# Altium PCB 175-00018_rev1, 3-Chan IR Thermocouple Apps board.PcbDoc
Units mil, origin at the board's own origin, x right, y up, seen from the top; angles counter-clockwise.
Board outline 1377.95 x 3149.61 mil, 4 copper layers (Top Layer (*.GTL), GND (*.GP1), +/- 12V (*.GP2), Bottom Layer (*.GBL)); 36 components, 28 nets, 243 pads, 43 vias.
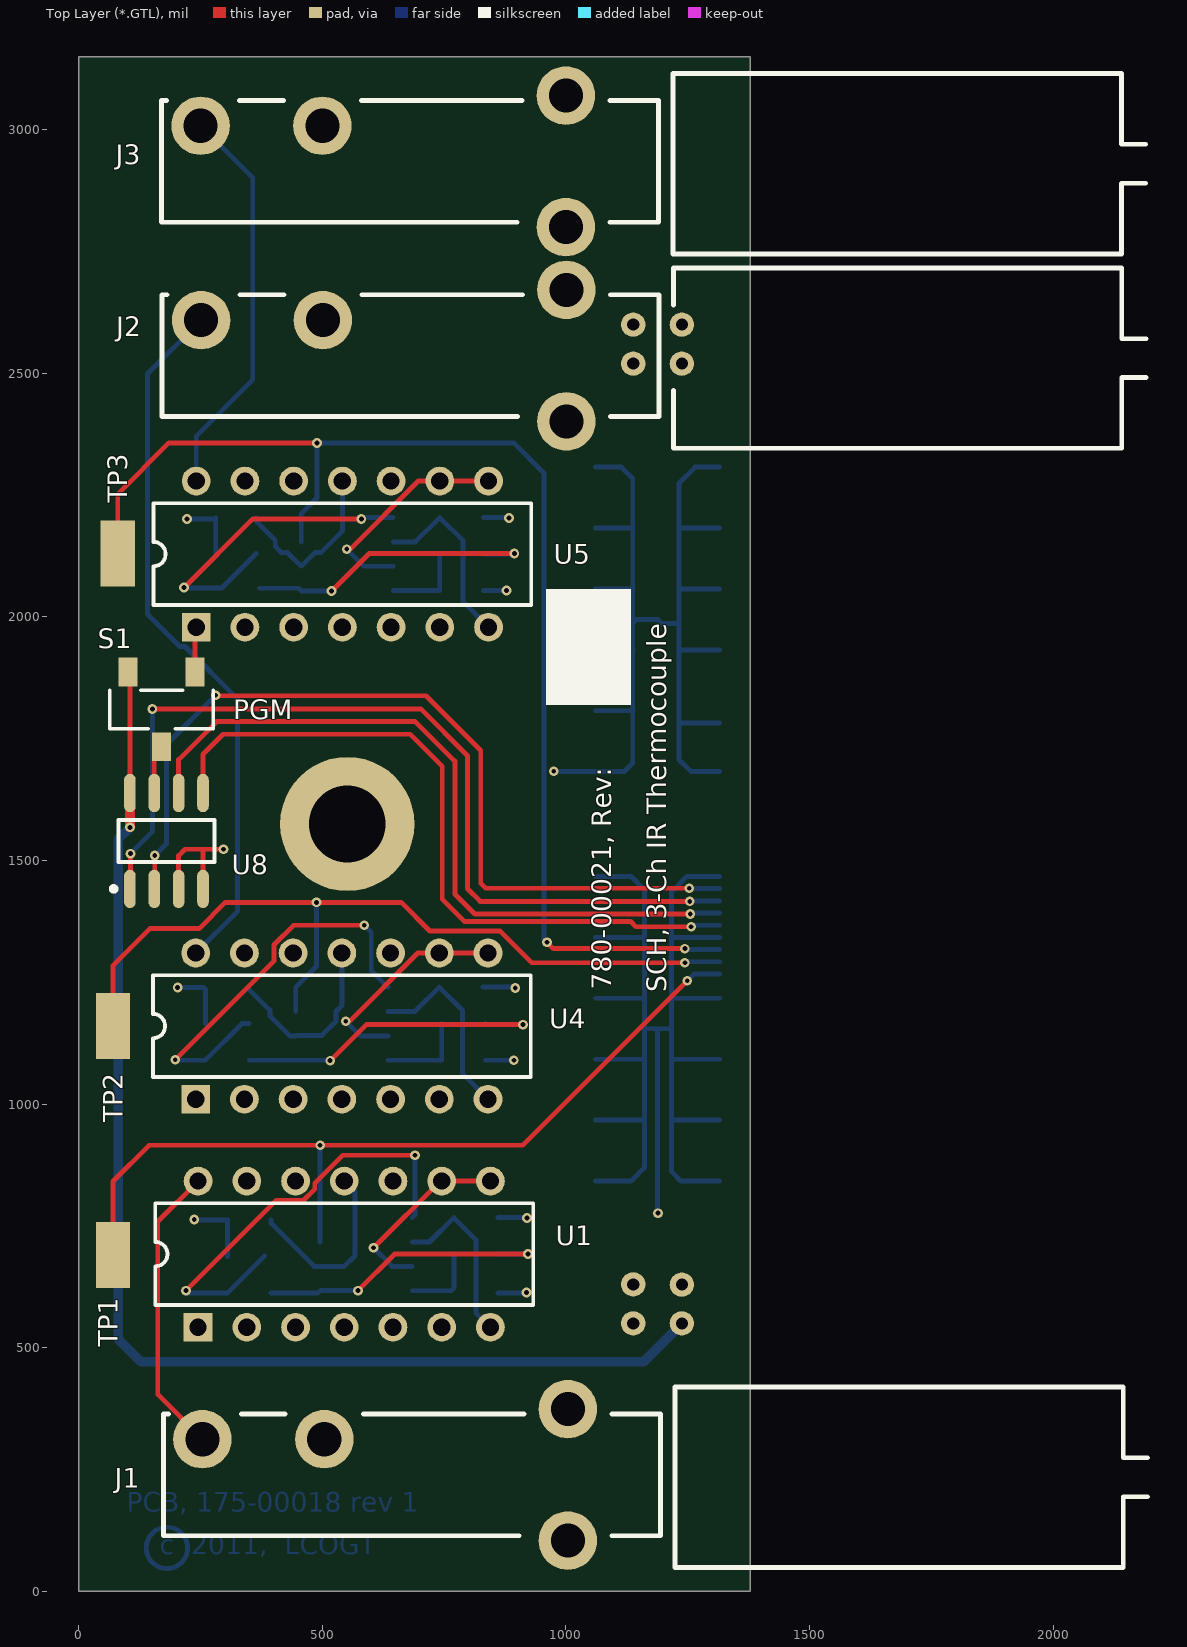
[diagram p0: Top Layer (*.GTL) view]
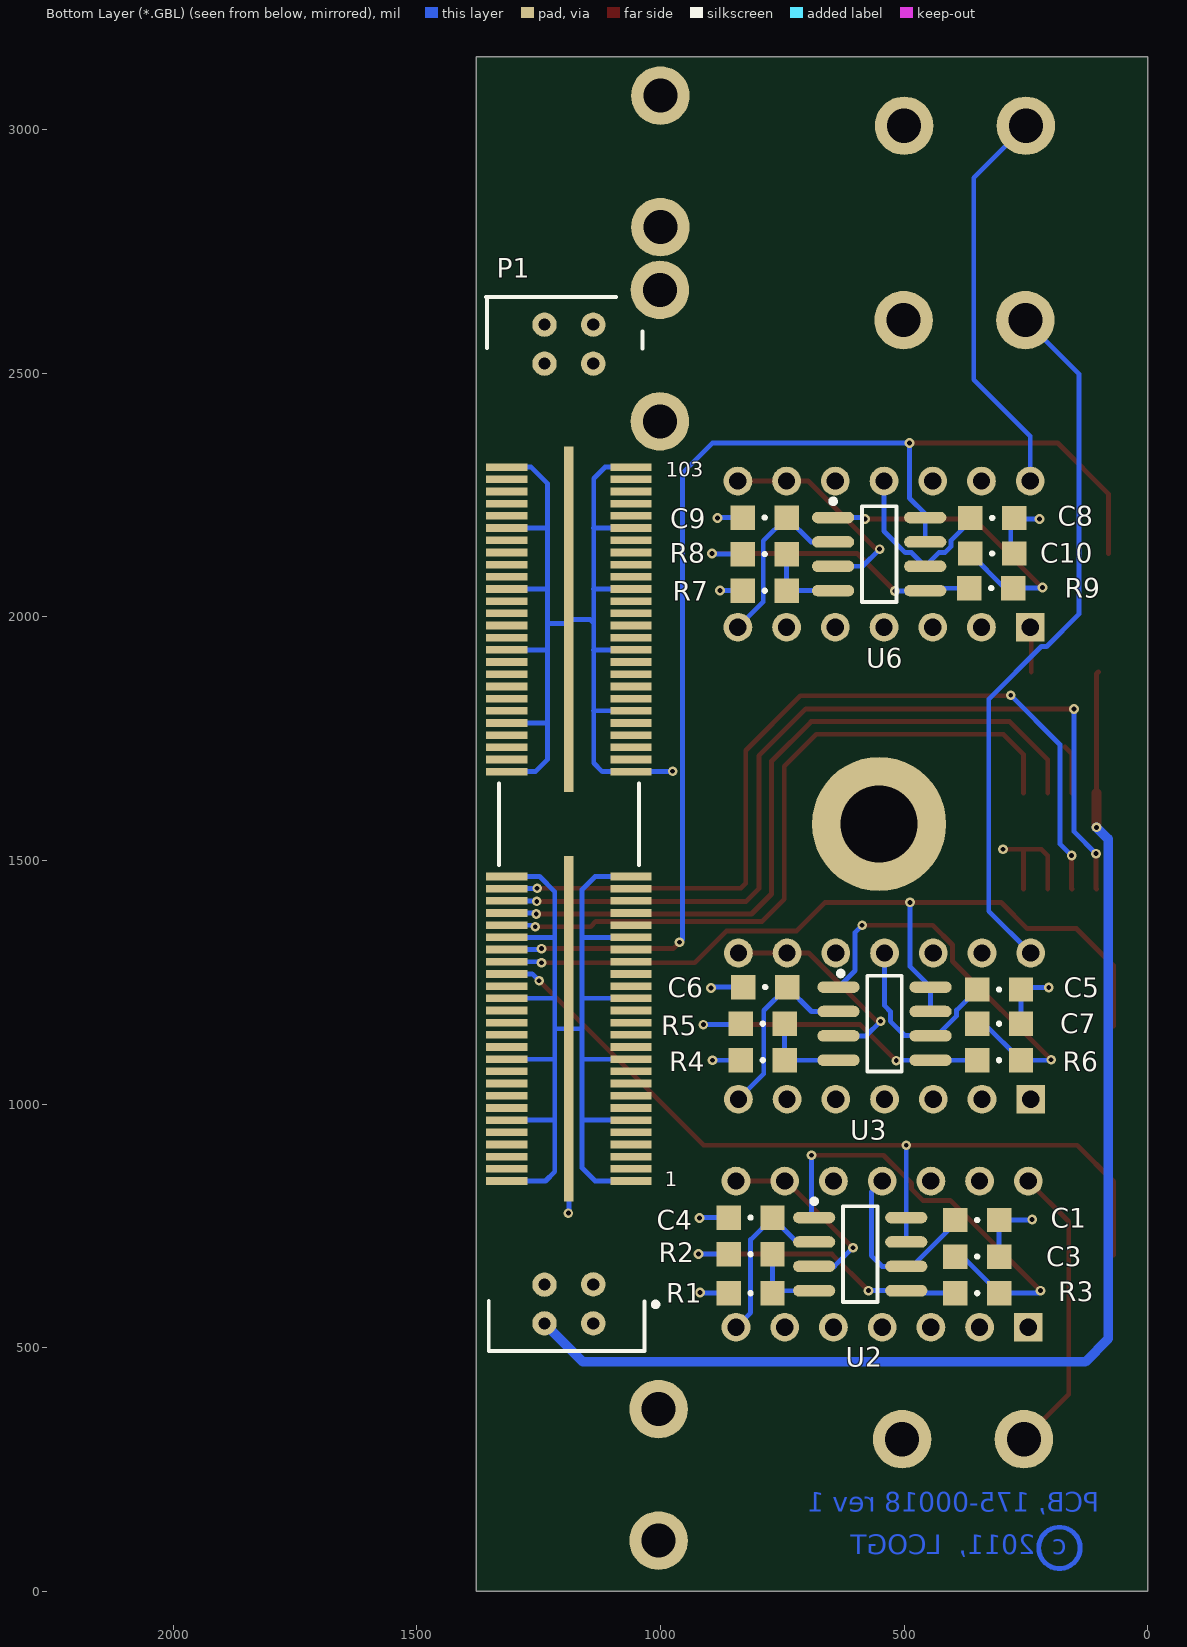
[diagram p1: Bottom Layer (*.GBL) view, seen from below]
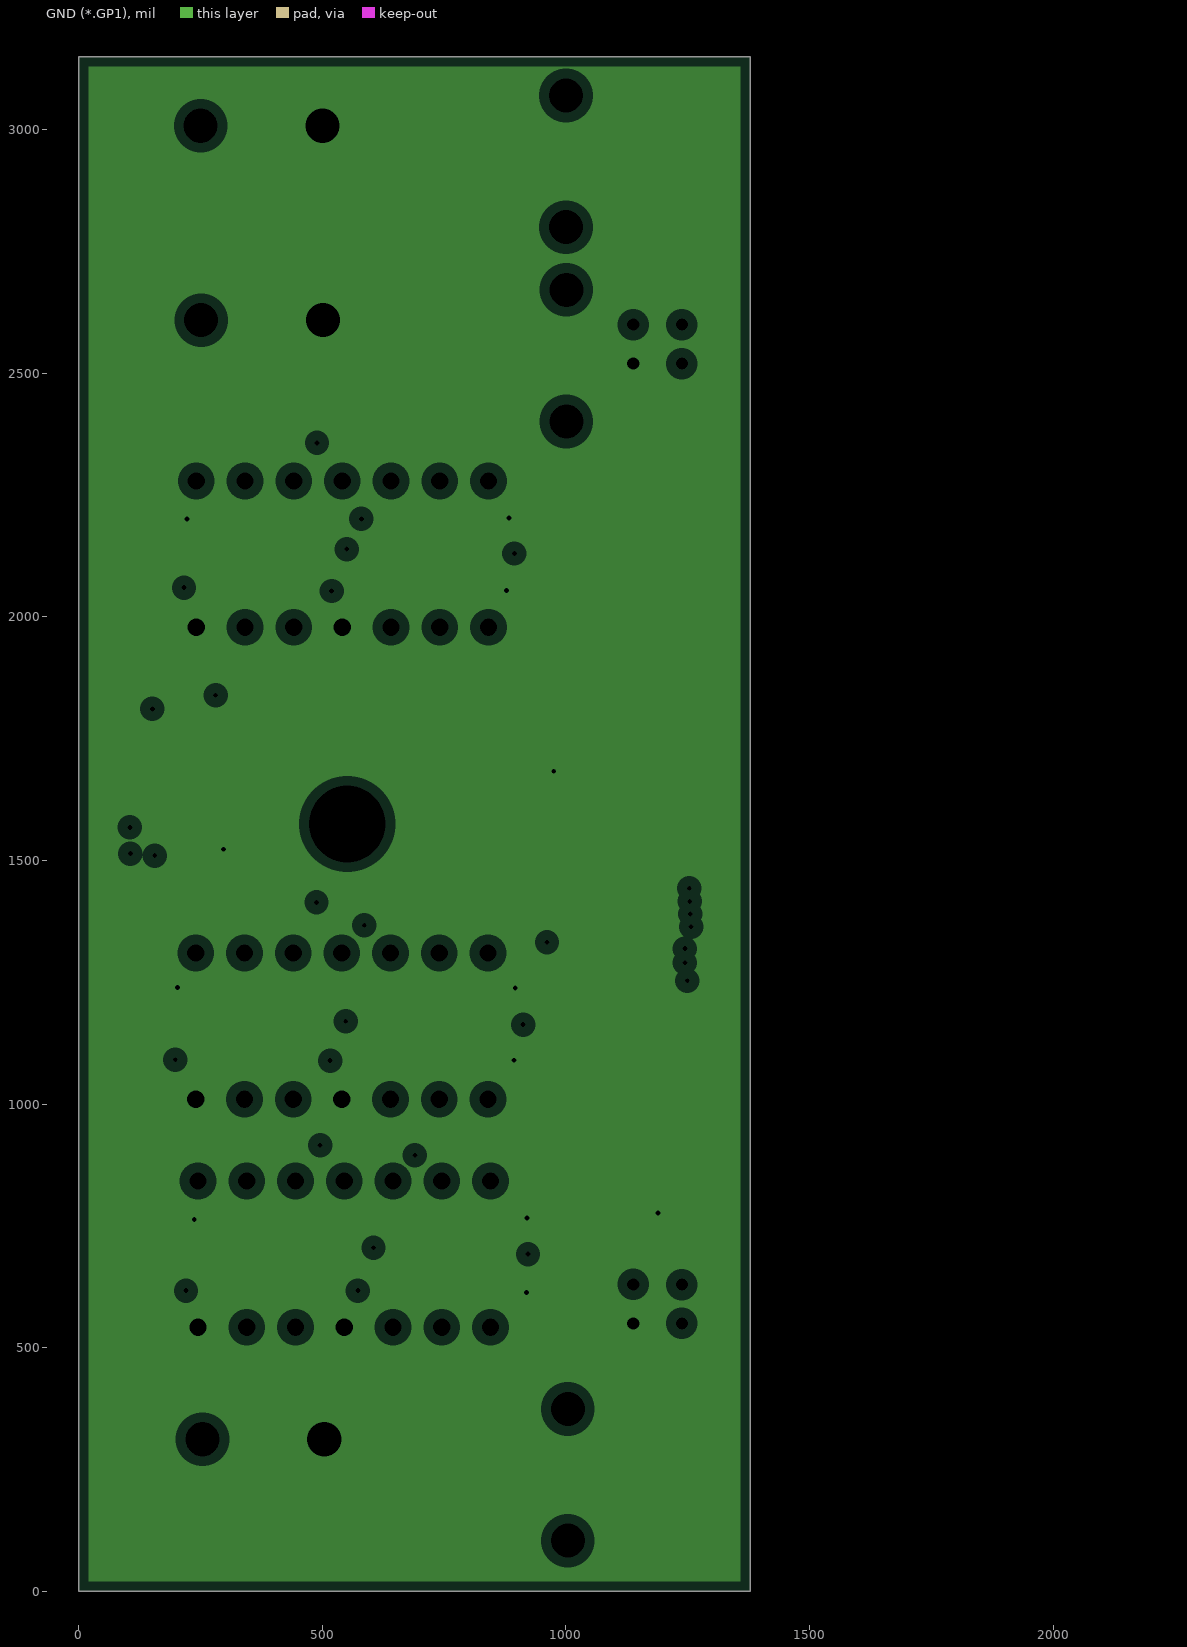
[diagram p2: GND (*.GP1), clearances drawn from the general rule]
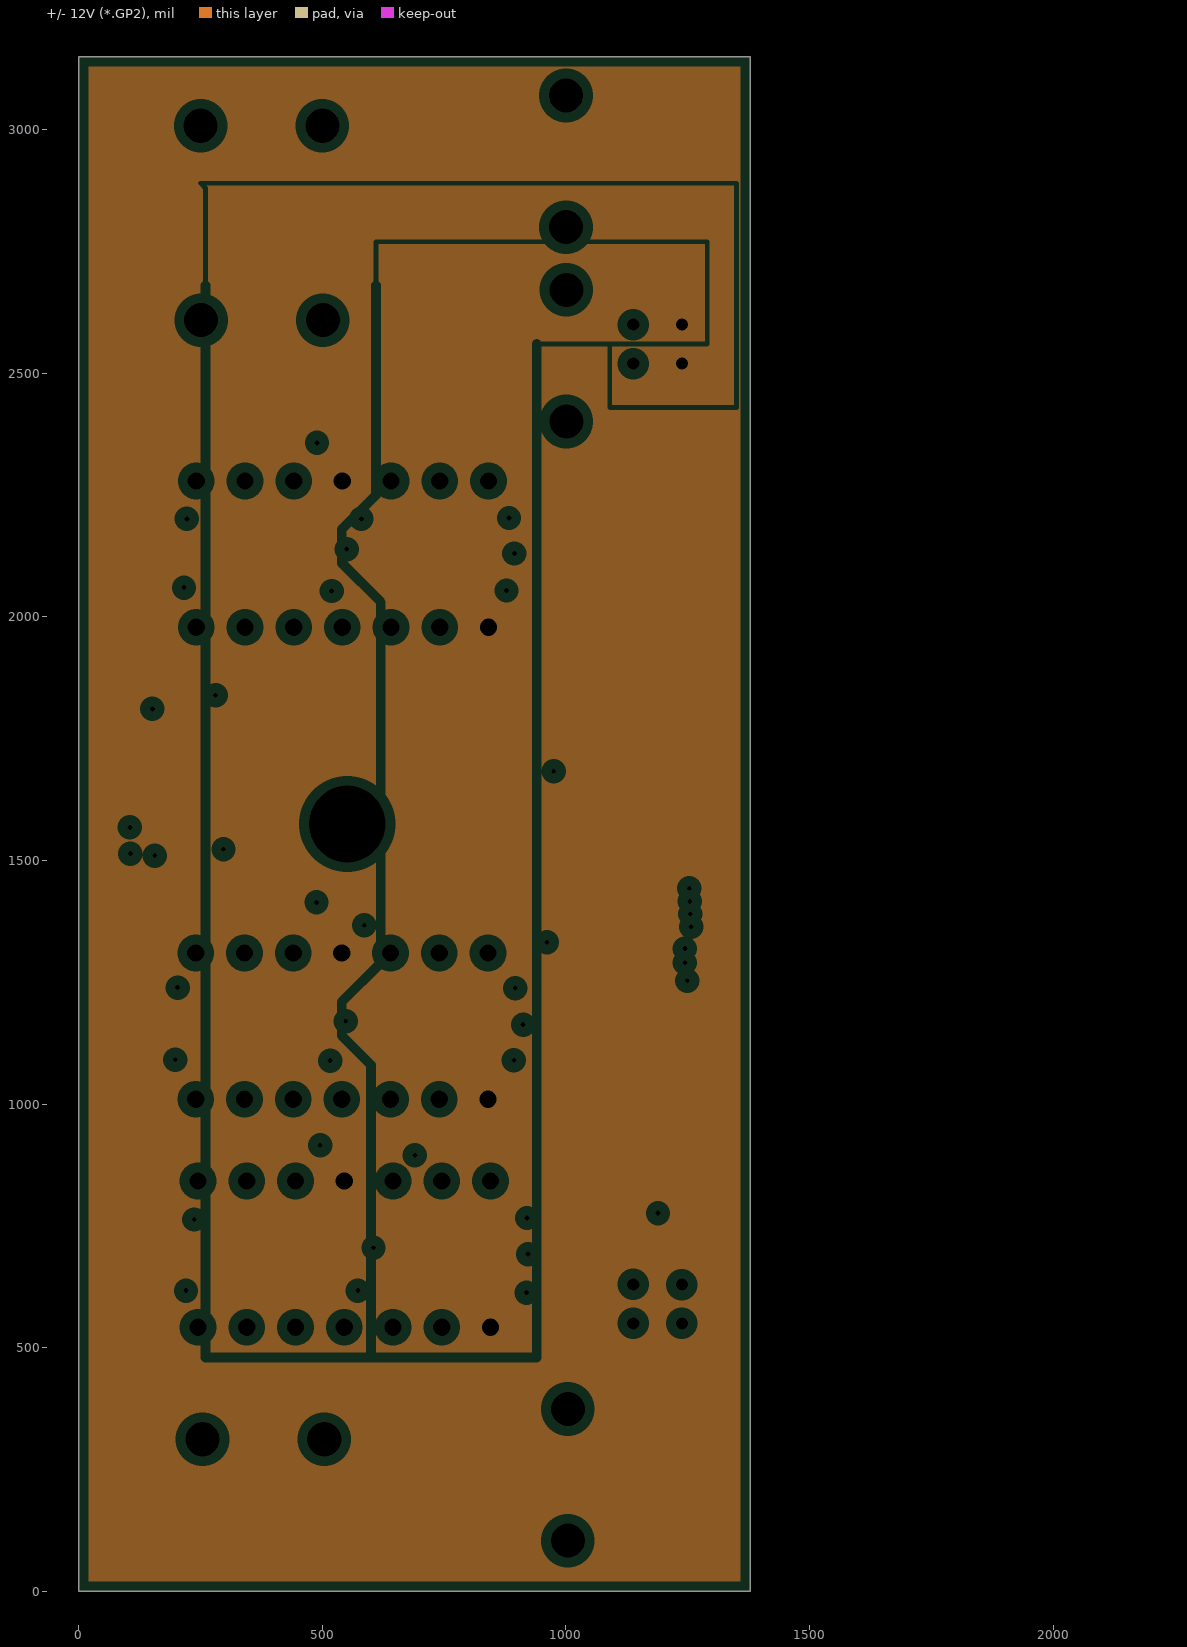
[diagram p3: +/- 12V (*.GP2), clearances drawn from the general rule]

## Layer stack, top to bottom
Top Layer (*.GTL): signal copper 1.4
Dielectric: core 12.6, FR-4, Dk 4.8
GND (*.GP1): plane copper 1.4, net GND
Dielectric: prepreg 12.6, FR-4, Dk 4.8
+/- 12V (*.GP2): plane copper 1.4, net (Multiple Nets)
Dielectric: core 12.6, FR-4, Dk 4.8
Bottom Layer (*.GBL): signal copper 1.4

## Board outline
0,0 0,3149.61 1377.95,3149.61 1377.95,0

## Design rules (kind name [scope] priority, off if disabled: settings)
Clearance [All] p1: gap=5
ComponentClearance "ComponentClear TC connectors" [(HasFootprint('THERMOCOUPLE, Vertical')) vs (HasFootprint('THERMOCOUPLE, Vertical'))] p1: gap=-39.37 collisioncheckmode=3 verticalgap=-39.37 showdistances=FALSE
ComponentClearance [All] p2: gap=10 collisioncheckmode=3 verticalgap=10 showdistances=FALSE
HoleSize [All] p1: absolutevalues=TRUE maxlimit=250 minlimit=1 maxpercent=80.000 minpercent=20.000
MinimumSolderMaskSliver [All] p1: minsoldermaskwidth=1
PlaneClearance [All] p1: clearance=20
PlaneConnect [All] p1: planeconnectstyle=Relief reliefexpansion=20 reliefentries=4 reliefconductorwidth=10 reliefairgap=10
PolygonConnect [All] p1: connectstyle=Relief reliefconductorwidth=10 reliefentries=4 polygonreliefangle="90 Angle"
RoomDefinition "780-00021_rev1,pg1,4-Chan IR Thermocouple Apps Module" [InComponentClass('780-00021_rev1,pg1,4-Chan IR Thermocouple Apps Module')] p1: confinementstyle=ConfineIn formatcopy=TRUE lockcomponents=FALSE outline -1292,-393.7 3937.01,-393.7 3937.01,4449 -1292,4449
RoutingVias [All] p1: holewidth=28 width=50 viastyle="Through Hole" minholewidth=10 minwidth=20 maxholewidth=28 maxwidth=50
SilkToSilkClearance [All] p1: silktosilkclearance=2
SilkscreenOverComponentPads [All] p1: minsilkscreentomaskgap=2
SolderMaskExpansion [All] p1: expansion=4
Width [All] p1: maxlimit=100 minlimit=10 preferedwidth=10
21 further rules are at their usual default settings.

## Classes and differential pairs
component class "780-00021_rev1,pg1,4-Chan IR Thermocouple Apps Module": C1 C3 C4 C5 C6 C7 C8 C9 C10 J1 J2 J3 P1 R1 R2 R3 R4 R5 R6 R7 R8 R9 S1 TP1 TP2 TP3 U1 U2 U3 U4 U5 U6 U8

## Components (designator, comment, footprint, x,y, rotation, side; value= is the part's Value field where it differs from the comment)
C1 "Cap SMD" SMD_0805 349.92,761.89 r0 bottom
C3 "Cap SMD" SMD_0805 349.92,686.89 r0 bottom
C4 "Cap SMD" SMD_0805 814.92,766.89 r180 bottom
C5 "Cap SMD" SMD_0805 305,1235 r0 bottom
C6 "Cap SMD" SMD_0805 785,1240 r180 bottom
C7 "Cap SMD" SMD_0805 305,1165 r0 bottom
C8 "Cap SMD" SMD_0805 319,2203 r0 bottom
C9 "Cap SMD" SMD_0805 786.06,2203.74 r180 bottom
C10 "Cap SMD" SMD_0805 319,2130 r0 bottom
J1 "PCC-SMP-V-K" "THERMOCOUPLE, Vertical" 1003.94,374.02 r180 top
J2 "PCC-SMP-V-K" "THERMOCOUPLE, Vertical" 1001,2671 r180 top
J3 "PCC-SMP-V-K" "THERMOCOUPLE, Vertical" 1000,3070 r180 top
P1 "QMSS-052-06.75-L-D-PC4" "QMS SMD PWR PINS - 104PIN" 1187.99,1574.8 r90 bottom
R1 "Res 0805" SMD_0805 814.92,611.89 r180 bottom
R2 "Res 0805" SMD_0805 814.92,691.89 r0 bottom
R3 "Res 0805" SMD_0805 349.92,611.89 r180 bottom
R4 "Res 0805" SMD_0805 790,1090 r180 bottom
R5 "Res 0805" SMD_0805 790,1165 r0 bottom
R6 "Res 0805" SMD_0805 305,1090 r180 bottom
R7 "Res 0805" SMD_0805 786.06,2053.74 r180 bottom
R8 "Res 0805" SMD_0805 786.06,2128.74 r0 bottom
R9 "Res 0805" SMD_0805 321,2059 r180 bottom
S1 "CJS-1200TB" CAS-120B 170,1810 r180 top
TP1 "Test Point SMD" "SMD_TEST POINT" 70,690 r270 top
TP2 "Test Point SMD" "SMD_TEST POINT" 70,1160 r270 top
TP3 "Test Point SMD" "SMD_TEST POINT" 80,2130 r90 top
U1 "AD595AQ" Q-14_A 544.92,691.89 r0 top
U2 "LT1124CS8#PBF" S8_N 589.92,691.89 r180 bottom
U3 "LT1124CS8#PBF" S8_N 540,1165 r180 bottom
U4 "AD595AQ" Q-14_A 540,1160 r0 top
U5 "AD595AQ" Q-14_A 541.06,2128.74 r0 top
U6 "LT1124CS8#PBF" S8_N 551.06,2128.74 r180 bottom
U8 "M24C32RMN1" SOP8_N 180,1540 r90 top
? "Comment" "TARGET MECHANICAL 5" 2540,3312 r0 top
? "Comment" "TARGET MECHANICAL 5" -871,3453 r0 top
? "Comment" "TARGET MECHANICAL 5" -970,-247 r0 top

## Footprints (in the part's own frame and the unit in brackets; to place one, negate y for a bottom-side part, rotate by r counter-clockwise, add the part's x,y. Pads: shape width x height; smd on the part's side, far side on the other; paste and mask are expansions set on the pad)
CAS-120B [mm] "Copal Electronics CAS SMD Slide Switch"
  rect 1x1.5 smd: 1(-1.75,-1.95) 2(0,1.95) 3(1.75,-1.95)
  silkscreen extent -2.69,-1 2.69,1
Q-14_A [mm] "DIP; 14 Leads; Row Spacing 7.62 mm; Pitch 2.54 mm"
  rect 1.5x1.5 hole 0.9: 1(-7.62,-3.81)
  round 1.5 hole 0.9: 2(-5.08,-3.81) 3(-2.54,-3.81) 4(0,-3.81) 5(2.54,-3.81) 6(5.08,-3.81) 7(7.62,-3.81) 8(7.62,3.81) 9(5.08,3.81) 10(2.54,3.81) 11(0,3.81) 12(-2.54,3.81) 13(-5.08,3.81) 14(-7.62,3.81)
  silkscreen extent -9.85,-2.65 9.85,2.65
"QMS SMD PWR PINS - 104PIN" [mm] "52pos (104 pin) + 8 pwr pins"
  rect 0.4x2.15 smd mask+0: 1(-18.612,-3.24) 2(-18.612,3.24) 3(-17.977,-3.24) 4(-17.977,3.24) 5(-17.342,-3.24) 6(-17.342,3.24) 7(-16.707,-3.24) 8(-16.707,3.24) 9(-16.072,-3.24) 10(-16.072,3.24) 11(-15.437,-3.24) 12(-15.437,3.24) 13(-14.802,-3.24) 14(-14.802,3.24) 15(-14.167,-3.24) 16(-14.167,3.24) 17(-13.532,-3.24) 18(-13.532,3.24) 19(-12.897,-3.24) 20(-12.897,3.24) 21(-12.262,-3.24) 22(-12.262,3.24) 23(-11.627,-3.24) 24(-11.627,3.24) 25(-10.992,-3.24) 26(-10.992,3.24) 27(-10.357,-3.24) 28(-10.357,3.24) 29(-9.722,-3.24) 30(-9.722,3.24) 31(-9.087,-3.24) 32(-9.087,3.24) 33(-8.452,-3.24) 34(-8.452,3.24) 35(-7.817,-3.24) 36(-7.817,3.24) 37(-7.182,-3.24) 38(-7.182,3.24) 39(-6.547,-3.24) 40(-6.547,3.24) 41(-5.912,-3.24) 42(-5.912,3.24) 43(-5.277,-3.24) 44(-5.277,3.24) 45(-4.642,-3.24) 46(-4.642,3.24) 47(-4.007,-3.24) 48(-4.007,3.24) 49(-3.372,-3.24) 50(-3.372,3.24) 51(-2.737,-3.24) 52(-2.737,3.24) 53(2.728,-3.24) 54(2.728,3.24) 55(3.363,-3.24) 56(3.363,3.24) 57(3.998,-3.24) 58(3.998,3.24) 59(4.633,-3.24) 60(4.633,3.24) 61(5.268,-3.24) 62(5.268,3.24) 63(5.903,-3.24) 64(5.903,3.24) 65(6.538,-3.24) 66(6.538,3.24) 67(7.173,-3.24) 68(7.173,3.24) 69(7.808,-3.24) 70(7.808,3.24) 71(8.443,-3.24) 72(8.443,3.24) 73(9.078,-3.24) 74(9.078,3.24) 75(9.713,-3.24) 76(9.713,3.24) 77(10.348,-3.24) 78(10.348,3.24) 79(10.983,-3.24) 80(10.983,3.24) 81(11.618,-3.24) 82(11.618,3.24) 83(12.253,-3.24) 84(12.253,3.24) 85(12.888,-3.24) 86(12.888,3.24) 87(13.523,-3.24) 88(13.523,3.24) 89(14.158,-3.24) 90(14.158,3.24) 91(14.793,-3.24) 92(14.793,3.24) 93(15.428,-3.24) 94(15.428,3.24) 95(16.063,-3.24) 96(16.063,3.24) 97(16.698,-3.24) 98(16.698,3.24) 99(17.333,-3.24) 100(17.333,3.24) 101(17.968,-3.24) 102(17.968,3.24) 103(18.603,-3.24) 104(18.603,3.24)
  rect 18x0.5 smd mask+0: 105(-10.672,0) 106(10.668,0)
  round 1.27 hole 0.635 mask+0: PC01(-26.035,-1.27) PC02(-26.035,1.27) PC03(-24.003,-1.27) PC04(-24.016,1.27) PC05(24.003,-1.27) PC06(24.003,1.27) PC07(26.035,-1.27) PC08(26.035,1.27)
  silkscreen extent -27.49,-4.65 27.48,4.32
S8_N [mm] "SOIC, 8-Leads, Body 4.9x3.9mm, Pitch 1.27mm, IPC Medium Density"
  oval 2.2x0.6 smd: 1(-2.4,1.905) 2(-2.4,0.635) 3(-2.4,-0.635) 4(-2.4,-1.905) 5(2.4,-1.905) 6(2.4,-0.635) 7(2.4,0.635) 8(2.4,1.905)
  silkscreen extent -2.53,-2.5 0.9,2.88, body extent -2,-2.5 2,2.5, height 1.76
SMD_0805 [mil]
  rect 50x50 smd: 1(-45,0) 2(45,0)
  silkscreen extent -1,-1 1,1
"SMD_TEST POINT" [mil] "Keystone 5015"
  rect 135x70 smd: 1(0,0)
SOP8_N [mm] "SOIC, 8-Leads, Body 4.9x3.9mm, Pitch 1.27mm, IPC Medium Density"
  oval 2x0.6 smd: 1(-2.5,1.905) 2(-2.5,0.635) 3(-2.5,-0.635) 4(-2.5,-1.905) 5(2.5,-1.905) 6(2.5,-0.635) 7(2.5,0.635) 8(2.5,1.905)
  silkscreen extent -2.62,-2.5 1.1,2.88, body extent -2,-2.5 2,2.5, height 1.75
"TARGET MECHANICAL 5" [mil]
"THERMOCOUPLE, Vertical" [mil] "Omega, PCB mount, vertical"
  round 120 hole 70: 0(0,270) 0(0,0) 1(500,62) 2(750,62)
  silkscreen extent -1190,-45 830,325

## Part data
C1 C3 C4 C5 C6 C7 C8 C9 C10: "Capacitor"
J1 J2 J3: library part "Thermocouple Connector", "T/C Conn PCB mount vertical"
P1: library part "QMSS-PC4-104 pin", "SAMTEC QMSS W/PWR PINS"
R1 R2 R3 R4 R5 R6 R7 R8 R9: library part "Res SMD", "Resistor 0805"
S1: library part SW_SPDT_DOUG
TP1 TP2 TP3: "SMD loop test point"
U1 U4 U5: "Monolithic Thermocouple Amplifier with Cold Junction Compensation"
U2 U3 U6: "Dual Low Noise, High-Speed Precision Operational Amplifier"
U8: "32 Kbit Serial I²C Bus EEPROM"

## Free pads (board coordinates)
  round 275.59 hole 157.48: 0(551.18,1574.8)

## Via types
v1: diameter 20, hole 10, Top Layer (*.GTL) to Bottom Layer (*.GBL), 43 vias

## Nets (pads, with @x,y where several pads share a name; then routed paths per layer and width w, separated by ;. In a path a pad name is that pad's centre, name@x,y a point inside that pad or via, vN(x,y) a via of type N, cw(c..) or ccw(c..) an arc to the next point about the centre after c; other vN are vias at no path point)
+3.3V: P1.PC02 S1.3 U8.8 | length 2589.4
  Top Layer (*.GTL) w10: S1.3 105,1882.87 U8.8
  Top Layer (*.GTL) w20: v1(105,1568) U8.8
  Bottom Layer (*.GBL) w20: v1(105,1568) 81,1544 81,518 128,471 1159.19,471 P1.PC02
+5V: P1.PC04
+12V: C1.2 C5.2 C8.2 P1.PC06 U1.11 U2.6 U3.6 U4.11 U5.11 U6.6 | length 1130.4
  Bottom Layer (*.GBL) w10: C5.2 392.2,1192.8 392.2,1180.97 433.17,1140 U3.6 446.51,1141 499,1141 528,1170 528,1190 540,1202 U4.11 ; C8.2 364,2196.31 403.27,2157.05 403.27,2144.71 416.04,2131.93 428.39,2131.93 U6.6 484.76,2131.93 497.11,2131.93 541.06,2175.89 U5.11 ; C1.2 394.92,755.06 483.09,666.89 U2.6 544.89,666.89 567,689 567,819.81 U1.11
-12V: C4.2 C6.2 C9.2 P1.PC08 U1.7 U2.2 U3.2 U4.7 U5.7 U6.2 | length 1142.6
  Bottom Layer (*.GBL) w10: U3.2 690,1190 C6.2 788,1192 788,1062 U4.7 ; U6.2 691.06,2153.74 C9.2 789,2155.8 789,2030.8 U5.7 ; U2.2 719.92,716.89 C4.2 815,721.81 815,571.81 U1.7
ANALOG_IN5: P1.36 TP1.1 U2.7 U2.8 | length 1772.4
  Top Layer (*.GTL) w10: TP1.1 70,841 144.43,915.43 v1(495.43,915.43) 911.43,915.43 v1(1249,1253)
  Bottom Layer (*.GBL) w10: U2.7 U2.8 v1(495.43,915.43) v1@496,916 ; v1(1249,1253) 1263.05,1267.05 P1.36
ANALOG_IN6: P1.38 TP2.1 U3.7 U3.8 | length 1717.2
  Top Layer (*.GTL) w10: TP2.1 70,1284 146,1360 247,1360 301,1414 v1(488,1414) 662,1414 721,1355 865,1355 930,1290 v1(1244,1290)
  Bottom Layer (*.GBL) w10: U3.7 U3.8 488,1282.49 v1(488,1414) ; v1(1244,1290) 1246.05,1292.05 P1.38
ANALOG_IN7: P1.40 TP3.1 U6.7 U6.8 | length 2609.1
  Top Layer (*.GTL) w10: TP3.1 80,2252 185,2357 v1(489,2357) ; v1(961,1332) 974,1319 v1(1244,1319)
  Bottom Layer (*.GBL) w10: U6.7 U6.8 456.57,2211.57 489,2244 v1(489,2357) 893,2357 955,2295 955,1338 v1(961,1332) ; v1(1244,1319) 1245.95,1317.05 P1.40
GND: C1.1 C3.1 C4.1 C5.1 C6.1 C7.1 C8.1 C9.1 C10.1 J1.1 J2.1 J3.1 P1.1 P1.2 P1.11 P1.12 P1.21 P1.22 P1.31 P1.32 P1.41 P1.42 P1.51 P1.52 P1.53 P1.54 P1.62 P1.63 P1.73 P1.74 P1.83 P1.84 P1.93 P1.94 P1.103 P1.104 P1.105 P1.106 P1.PC01 P1.PC05 R1.1 R4.1 R7.1 S1.1 U1.1 U1.4 U4.1 U4.4 U5.1 U5.4 U8.3 U8.4 | length 6230.5
  Top Layer (*.GTL) w10: U8.3 205,1510 218,1523 254,1523 ; S1.1 238.9,1976.57 U5.1 ; U8.4 255,1522 254,1523 ; v1(297,1523) 254,1523
  Bottom Layer (*.GBL) w10: v1(203,1239) 256,1239 C5.1 C7.1 ; v1(222,2201) 278.32,2201 281.06,2203.74 281.06,2203 C10.1@281.06,2128.74 ; v1(237,763) 238.11,761.89 C1.1 C3.1 ; C6.1 894,1240 v1(896,1238) ; R7.1 877.74,2053.74 v1(878,2054) ; C9.1 882.26,2203.74 v1(883,2203) ; R4.1 v1(893,1090) ; R1.1 917.89,611.89 v1(919,613) ; C4.1 919.11,766.89 v1(920,766) ; v1(975,1683) 975.8,1682.2 P1.53 1119.2,1682.2 1137,1700 1137,1807.2 ; P1.1 1134.05,842.05 1161,869 1161,1154.5 ; P1.11 1156.94,967.05 ; P1.21 1156.94,1092.05 ; P1.31 1156.94,1217.05 ; P1.41 1156.94,1342.05 ; P1.51 1133.95,1467.05 1161,1440 1161,1154.5 ; P1.63 1137,1807.2 ; P1.73 1137,1932.2 ; P1.83 1137,2057.2 ; P1.93 1137,2182.2 ; P1.103 1113.8,2307.2 1137,2284 1137,2182.2 ; 1138,1807.2 1137,1807.2 ; 1138,1932.2 1137,1932.2 ; 1138,2057.2 1137,2057.2 ; 1138,2182.2 1137,2182.2 ; v1(1189,776) 1187.99,777.01 P1.105 ; 1219.05,1092.05 P1.22 ; 1219.05,1217.05 P1.32 ; 1219.05,1342.05 P1.42 ; 1232.8,1782.2 P1.62 ; 1232.8,1932.2 P1.74 ; 1232.8,2057.2 P1.84 ; 1232.8,2182.2 P1.94 ; P1.2 1235.95,842.05 1217,861 1217,965 ; P1.12 1219.05,967.05 1217,965 ; P1.52 1248.05,1467.05 1217,1436 1217,1155 ; P1.54 1256.8,1682.2 1232,1707 1232,1986 ; P1.104 1265.2,2307.2 1232,2274 1232,1986 ; 1137,1807.2 1137,1932.2 ; 1137,1932.2 1137,1987 ; 1137,1987 1137,2057.2 ; 1137,1987 1144.8,1994.8 P1.106 1196.8,1986 1232,1986 ; 1137,2057.2 1137,2182.2 ; 1161,1154.5 1161.15,1154.65 P1.105 ; P1.105 1216.65,1154.65 1217,1155 ; 1217,965 1217,1155
I2C_SCL: P1.46 U8.6 | length 1535.7
  Top Layer (*.GTL) w10: U8.6 205,1707 283,1785 690.77,1785 772,1703.77 772,1431.05 813.05,1390 v1(1255,1390)
  Bottom Layer (*.GBL) w10: v1(1255,1390) 1257.05,1392.05 P1.46
I2C_SDA: P1.44 U8.5 | length 1481.7
  Top Layer (*.GTL) w10: U8.5 255,1718 296,1759 680,1759 746,1693 746,1420.28 791.38,1374.9 1132.42,1374.9 1143.32,1364 v1(1257,1364)
  Bottom Layer (*.GBL) w10: v1(1257,1364) 1260.05,1367.05 P1.44
NetC3_2: C3.2 R3.2 U2.1 | length 918.2
  Top Layer (*.GTL) w10: v1(220,617) 405.36,802.36 461.29,802.36 484.45,825.52 484.45,837.32 542.13,895 v1(690,895)
  Bottom Layer (*.GBL) w10: v1(220,617) 225.11,611.89 R3.2 C3.2@381.73,688.7 ; U2.1 690,772.48 v1(690,895)
NetC7_2: C7.2 R6.2 U3.1 | length 852.2
  Top Layer (*.GTL) w10: v1(198,1091) 400.47,1293.47 400.47,1326.37 441.1,1367 v1(586,1367)
  Bottom Layer (*.GBL) w10: v1(198,1091) 199,1090 R6.2 335,1165 C7.2 ; v1(586,1367) 600.47,1352.53 600.47,1274.02 U3.1
NetC10_2: C10.2 R9.2 U6.1 | length 666.9
  Top Layer (*.GTL) w10: v1(216,2060) 357,2201 v1(580,2201)
  Bottom Layer (*.GBL) w10: v1(216,2060) 217,2059 R9.2 293,2059 C10.2 ; v1(580,2201) 582.74,2203.74 U6.1
NetJ1_2: J1.2 U1.14 | length 602.3
  Top Layer (*.GTL) w10: U1.14 162,758.97 162,403.95 J1.2
NetJ2_2: J2.2 U4.14 | length 1461.6
  Bottom Layer (*.GBL) w10: U4.14 326,1396 326,1831.21 218,1939.21 207.39,1939.21 141,2005.61 141,2499 J2.2@250,2608
NetJ3_2: J3.2 U5.14 | length 821.6
  Bottom Layer (*.GBL) w10: U5.14 241.06,2371.06 357,2487 357,2901 J3.2
NetR1_2: R1.2 R2.1 U2.4 | length 157.6
  Bottom Layer (*.GBL) w10: U2.4 764.92,616.89 769.92,621.89 R2.1
NetR2_2: R2.2 R3.1 U2.5 | length 622.2
  Top Layer (*.GTL) w10: v1(573,617) 648,692 v1(922,692)
  Bottom Layer (*.GBL) w10: R3.1 490.43,611.89 U2.5 495.54,617 v1(573,617) ; R2.2@860.03,692 v1(922,692)
NetR4_2: R4.2 R5.1 U3.4 | length 185.5
  Bottom Layer (*.GBL) w10: U3.4 R4.2 R5.1
NetR5_2: R5.2 R6.1 U3.5 | length 670.9
  Top Layer (*.GTL) w10: v1(516,1089) 590,1163 v1(912,1163)
  Bottom Layer (*.GBL) w10: R6.1 U3.5 515,1090 v1(516,1089) ; R5.2 837,1163 v1(912,1163)
NetR7_2: R7.2 R8.1 U6.4 | length 170.5
  Bottom Layer (*.GBL) w10: U6.4 R7.2 R8.1
NetR8_2: R8.2 R9.1 U6.5 | length 620.7
  Top Layer (*.GTL) w10: v1(519,2053) 596,2130 v1(894,2130)
  Bottom Layer (*.GBL) w10: R9.1@371.06,2058.74 451.57,2058.74 U6.5 457.31,2053 v1(519,2053) ; R8.2 892.74,2128.74 v1(894,2130)
NetS1_2: S1.2 U8.7 | length 101
  Top Layer (*.GTL) w10: U8.7 155,1718.23 S1.2
NetU1_8: U1.8 U1.9 U2.3 | length 391.8
  Top Layer (*.GTL) w10: v1(605,705) 741.89,841.89 U1.9 U1.8
  Bottom Layer (*.GBL) w10: v1(605,705) 643.11,666.89 U2.3
NetU3_3: U3.3 U4.8 U4.9 | length 448.9
  Top Layer (*.GTL) w10: v1(548,1170) 555.9,1170 695.9,1310 U4.9 U4.8
  Bottom Layer (*.GBL) w10: v1(548,1170) 578,1140 U3.3
NetU5_8: U5.8 U5.9 U6.3 | length 459.1
  Top Layer (*.GTL) w10: v1(550,2139) 557.22,2139 696.96,2278.74 U5.9 U5.8
  Bottom Layer (*.GBL) w10: v1(550,2139) 585.26,2103.74 U6.3
SLOT_ID0: P1.48 U8.1 | length 1876.8
  Top Layer (*.GTL) w10: U8.1 106,1442.57 v1(106,1514) ; v1(151,1811) 701.54,1811 798,1714.54 798,1441.82 823.82,1416 v1(1254,1416)
  Bottom Layer (*.GBL) w10: v1(106,1514) 151,1559 v1(151,1811) ; v1(1254,1416) 1255.05,1417.05 P1.48
SLOT_ID1: P1.50 U8.2 | length 1808.3
  Top Layer (*.GTL) w10: U8.2 156,1442.57 v1(156,1510) ; v1(281,1839) 282,1838 712.72,1838 825,1725.72 825,1453 835,1443 v1(1253,1443)
  Bottom Layer (*.GBL) w10: v1(156,1510) 180,1534 180,1738 v1(281,1839) ; v1(1253,1443) 1253.95,1442.05 P1.50
pads on no net: J1.0 J2.0 J3.0 P1.3 P1.4 P1.5 P1.6 P1.7 P1.8 P1.9 P1.10 P1.13 P1.14 P1.15 P1.16 P1.17 P1.18 P1.19 P1.20 P1.23 P1.24 P1.25 P1.26 P1.27 P1.28 P1.29 P1.30 P1.33 P1.34 P1.35 P1.37 P1.39 P1.43 P1.45 P1.47 P1.49 P1.55 P1.56 P1.57 P1.58 P1.59 P1.60 P1.61 P1.64 P1.65 P1.66 P1.67 P1.68 P1.69 P1.70 P1.71 P1.72 P1.75 P1.76 P1.77 P1.78 P1.79 P1.80 P1.81 P1.82 P1.85 P1.86 P1.87 P1.88 P1.89 P1.90 P1.91 P1.92 P1.95 P1.96 P1.97 P1.98 P1.99 P1.100 P1.101 P1.102 P1.PC03 P1.PC07 U1.2 U1.3 U1.5 U1.6 U1.10 U1.12 U1.13 U4.2 U4.3 U4.5 U4.6 U4.10 U4.12 U4.13 U5.2 U5.3 U5.5 U5.6 U5.10 U5.12 U5.13
copper on no net: | length 267.2
  Bottom Layer (*.GBL) w10: 223.52,89 ccw(c181,89) 223.52,89

## Polygon pours and split planes (outlines as drawn)
GND on GND (*.GP1) (split plane): 1357.86,20.1 20.1,20.1 20.1,3129.51 1357.86,3129.51
+12V on +/- 12V (*.GP2) (split plane): 1344.9,2435.1 1095.1,2435.1 1095.1,2554.9 1290,2554.9 1291.95,2555.29 1293.6,2556.4 1294.71,2558.05 1295.1,2560 1295.1,2770 1294.71,2771.95 1293.6,2773.6 1291.95,2774.71 1290,2775.1 610,2775.1 608.05,2774.71 606.4,2773.6 605.29,2771.95 604.9,2770 604.9,2688.69 602.87,2687.13 601.26,2685.04 600.26,2682.61 599.91,2680 599.91,2254.18 532.87,2187.13 531.26,2185.04 530.26,2182.61 529.91,2180 529.91,2110 530.26,2107.39 531.26,2104.96 532.87,2102.87 609.91,2025.82 609.91,1294.18 532.87,1217.13 531.26,1215.04 530.26,1212.61 529.91,1210 529.91,1140 530.26,1137.39 531.26,1134.96 532.87,1132.87 589.91,1075.82 589.91,550 589.91,490.09 270.09,490.09 270.09,2680 269.74,2682.61 268.73,2685.04 267.13,2687.13 265.1,2688.69 265.1,2880 264.71,2881.95 263.6,2883.6 262.31,2884.9 1344.9,2884.9
-12V on +/- 12V (*.GP2) (split plane): 1284.9,2565.1 948.69,2565.1 947.13,2567.13 945.04,2568.74 942.61,2569.74 940,2570.09 937.39,2569.74 934.96,2568.74 932.87,2567.13 931.26,2565.04 930.26,2562.61 929.91,2560 929.91,490.09 610.09,490.09 610.09,550 610.09,1080 609.74,1082.61 608.73,1085.04 607.13,1087.13 550.09,1144.18 550.09,1205.82 627.13,1282.87 628.73,1284.96 629.74,1287.39 630.09,1290 630.09,2030 629.74,2032.61 628.73,2035.04 627.13,2037.13 550.09,2114.18 550.09,2175.82 617.13,2242.87 618.73,2244.96 619.74,2247.39 620.09,2250 620.09,2680 619.74,2682.61 618.73,2685.04 617.13,2687.13 615.1,2688.69 615.1,2764.9 1284.9,2764.9
no net on +/- 12V (*.GP2) (split plane): 1357.86,20.1 20.1,20.1 20.1,3129.51 1357.86,3129.51

## Other copper
Top Layer (*.GTL):
  text "*.GTL - TOP LAYER GERBER DATA" at -490,-1152 h80
Bottom Layer (*.GBL):
  text "PCB, 175-00018 rev 1" at 99,163 h40
  text "c  2011,  LCOGT" at 166,76 h40
  text "*.GBL - BOTTOM LAYER GERBER DATA" at -490,-1152 h80
GND (*.GP1) (plane layer: these items are gaps in the copper):
  text "*.GP1 - INTERNAL PLANE LAYER 1 GERBER DATA" at -497,-1152 h80
+/- 12V (*.GP2) (plane layer: these items are gaps in the copper):
  lines w10: 260,2680 260,2880 250,2890 1350,2890 1350,2430 1090,2430 1090,2560 ; 610,2680 610,2770 1290,2770 1290,2560 1240,2560 1090,2560 ; 940,2560 1090,2560
  lines w20: 260,2680 260,480 530,480 600,480 ; 610,2680 610,2250 540,2180 540,2110 620,2030 620,1290 540,1210 540,1140 600,1080 600,550 600,480 ; 940,2560 940,480 600,480
  text "*.GP2 - INTERNAL PLANE LAYER 2 GERBER DATA" at -490,-1152 h80

## Silkscreen, mask and mechanical layers (free items; w line width, h text height)
Top Overlay:
  rectangle: 959,1819 1134,2057
  lines w10: 1221,2346 1221,2465 ; 1221,2640 1221,2716
  text "PGM" at 317,1790 h40
  text "780-00021, Rev:" at 1093,1235 h40 r90
  text "SCH, 3-Ch IR Thermocouple" at 1206,1229 h40 r90
  text "*.GTO - TOP OVERLAY GERBER DATA" at -490,-1152 h80
Bottom Overlay:
  text "*GBO - BOTTOM OVERLAY GERBER DATA" at -490,-1152 h80
Top Paste:
  text "*.GTP - TOP-SIDE SOLDER PASTE MASK" at -490.01,-1151.99 h80
Bottom Paste:
  text "*.GBP - BOTTOM-SIDE SOLDER PASTE MASK" at -490.01,-1151.99 h80
Top Solder:
  text "*.GTS - TOP SOLDER MASK GERBER DATA" at -490,-1152 h80
Bottom Solder:
  rectangle: 80,14 882,233
  text "*.GBS - BOTTOM SOLDER MASK GERBER DATA" at -490,-1152 h80
Mechanical 1:
  the board outline again, w20
Mechanical 2:
  lines w10: -14239,-7214 -14239,8786 6761,8786 6761,-7214 -14239,-7214 ; 2706,-7108 ccw(c2756,-7108) 2756,-7158 3086,-7158 ccw(c3086,-7118) 3126,-7118 3126,-6948 ccw(c3086,-6948) 3086,-6908 2706,-6908 2706,-7108 ; 2706,-6818 ccw(c2756,-6818) 2756,-6868 6656,-6868 ccw(c6656,-6818) 6706,-6818 6706,-6628 ccw(c6656,-6628) 6656,-6578 2706,-6578 2706,-6818 ; 2706,-6488 ccw(c2756,-6488) 2756,-6538 4636,-6538 ccw(c4636,-6488) 4686,-6488 4686,-6338 ccw(c4636,-6338) 4636,-6288 2706,-6288 2706,-6488 ; 2706,-6208 ccw(c2746,-6208) 2746,-6248 3556,-6248 ccw(c3556,-6198) 3606,-6198 3606,-6048 ccw(c3556,-6048) 3556,-5998 2706,-5998 2706,-6208 ; 3166,-7118 ccw(c3206,-7118) 3206,-7158 5166,-7158 ccw(c5166,-7118) 5206,-7118 5206,-6948 ccw(c5166,-6948) 5166,-6908 3166,-6908 3166,-7118 ; 3646,-6198 ccw(c3696,-6198) 3696,-6248 4636,-6248 ccw(c4636,-6198) 4686,-6198 4686,-6048 ccw(c4636,-6048) 4636,-5998 3646,-5998 3646,-6198 ; 4726,-6488 ccw(c4776,-6488) 4776,-6538 6656,-6538 ccw(c6656,-6488) 6706,-6488 6706,-6338 ccw(c6656,-6338) 6656,-6288 4726,-6288 4726,-6488 ; 4726,-6198 ccw(c4776,-6198) 4776,-6248 5716,-6248 ccw(c5716,-6198) 5766,-6198 5766,-6048 ccw(c5716,-6048) 5716,-5998 4726,-5998 4726,-6198 ; 5246,-7108 ccw(c5296,-7108) 5296,-7158 5626,-7158 ccw(c5626,-7118) 5666,-7118 5666,-6948 ccw(c5626,-6948) 5626,-6908 5246,-6908 5246,-7108 ; 5706,-7118 ccw(c5746,-7118) 5746,-7158 6656,-7158 ccw(c6656,-7108) 6706,-7108 6706,-6958 ccw(c6656,-6958) 6656,-6908 5706,-6908 5706,-7118 ; 5806,-6198 ccw(c5856,-6198) 5856,-6248 6656,-6248 ccw(c6656,-6198) 6706,-6198 6706,-6048 ccw(c6656,-6048) 6656,-5998 5806,-5998 5806,-6198
  lines w14: -13397,-3119.67 -8636,-3119.67 ; -13397,-2871.97 -8636,-2871.97 ; -13457,-5486 ccw(c-13377,-5486) -13377,-5566 -8656,-5566 ccw(c-8656,-5486) -8576,-5486 -8576,-1987 ccw(c-8656,-1987) -8656,-1907 -13377,-1907 ccw(c-13377,-1987) -13457,-1987 -13457,-5486
  lines w20: -14218.94,-6568.12 cw(c-14169,-6643) -14169,-6553 ; -14169,-6593 ccw(c-14169,-6643) -14219,-6643 -14219,-7133 ccw(c-14169,-7133) -14169,-7183 -10969,-7183 ccw(c-10969,-7133) -10919,-7133 -10919,-6793 ccw(c-10969,-6793) -10969,-6743 -13609,-6743 ; -10894.12,-7182.94 ccw(c-10969,-7133) -10879,-7133 -10879,-6793 ; 2662.17,-7197.98 cw(c2756,-7108) 2626,-7108 2626,-5438 cw(c2756,-5438) 2756,-5308 6656,-5308 cw(c6656,-5438) 6744.66,-5342.92 ; -6709,-7034 ccw(c-6579,-7034) -6579,-7164 -1839,-7164 ccw(c-1839,-7034) -1709,-7034 -1709,-5444 ccw(c-1839,-5444) -1839,-5314 -6579,-5314 ccw(c-6579,-5444) -6709,-5444 -6709,-7034 ; 2666,-7108 ccw(c2756,-7108) 2756,-7198 6656,-7198 ccw(c6656,-7108) 6746,-7108 6746,-5438 ccw(c6656,-5438) 6656,-5348 2756,-5348 ccw(c2756,-5438) 2666,-5438 2666,-7108
  lines w24: -4159,-7004 -4009,-7004 ; -4159,-6754 -4009,-6754 ; -4159,-6504 -4009,-6504 ; -4159,-6254 -4009,-6254 ; -4159,-6004 -4009,-6004
  lines w30: -14739,-7714 -14739,9286 7261,9286 7261,-7714 -14739,-7714
  lines w50: 2851,-5849 4501,-5849 ; 2851,-5469 4501,-5469 ; 4501,-5849 4501,-5469 ; 4501,-5849 2841,-5849 2841,-5469 4501,-5469
  text "NOTES (UNLESS OTHERWISE SPECIFIED):" at -13919,8262 h90
  text "GENERAL" at -13819,8062 h90
  text "1)" at -13719,7861.95 h75
  text "PCB IS 4-LAYER, .062\" THICK." at -13519,7861.97 h75
  text "2)" at -13719,7711.95 h75
  text "CONSTRUCTION IS SOLDER-MASK-OVER-BARE-COPPER (SMOBC)." at -13519,7711.95 h75
  text "3)" at -13719,7561.95 h75
  text "ACCEPTABILITY SHALL BE BASED ON IPC-A-600, CLASS 2." at -13519,7561.95 h75
  text "4)" at -13719,7411.95 h75
  text "THE FOLLOWING GERBER RS274X PHOTO TOOL FILES SHALL BE USED TO DEFINE ALL CIRCUIT FEATURES:" at -13519,7411.95 h75
  text "*.GTL - TOP LAYER GERBER DATA" at -13245,7201 h80
  text "*.GP1 - INTERNAL PLANE LAYER 1 GERBER DATA" at -13245,6586.34 h80
  text "*.GP2 - INTERNAL PLANE LAYER 2 GERBER DATA" at -13245,6432.67 h80
  text "*.GBL - BOTTOM LAYER GERBER DATA" at -13245,5818 h80
  text "*.GTO - TOP OVERLAY GERBER DATA" at -13245,5664.34 h80
  text "*.GTS - TOP SOLDER MASK GERBER DATA" at -13245,5510.67 h80
  text "*.GTP - TOP-SIDE SOLDER PASTE MASK" at -13245.01,5357 h80
  text "*GBO - BOTTOM OVERLAY GERBER DATA" at -13245,5203.34 h80
  text "*.GBS - BOTTOM SOLDER MASK GERBER DATA" at -13245,5049.67 h80
  text "*.GBP - BOTTOM-SIDE SOLDER PASTE MASK" at -13245.01,4896 h80
  text "5)" at -13816,4180.23 h75
  text "THE PHOTO TOOL SHALL NOT BE COMPENSATED WITHOUT PRIOR ENGINEERING APPROVAL." at -13616,4180.23 h75
  text "PCB DESIGNER: RICH LOBDILL   PH (805) 880-1621  FAX (805) 961-1792." at -13616,4030.28 h75
  text "FABRICATION TOLERANCES" at -13761,3704 h90
  text "6)" at -13661,3503.95 h75
  text "END PRODUCT CONDUCTOR WIDTHS AND PAD DIAMETERS SHALL NOT VARY MORE THAN" at -13461,3503.95 h75
  text "0.002\" FROM THE 1:1 DIMENSIONS OF THE MASTER ARTWORK." at -13461,3354 h75
  text "7)" at -13661,3203.95 h75
  text "THE CONDUCTIVE PATTERN SHALL BE POSITIONED SO THAT THE LOCATION OF ANY PAD OR" at -13461,3203.95 h75
  text "LAND SHALL BE WITHIN 0.005\" DIAMETER TO THE TRUE POSITION OF THE HOLE IT CIRCUMSCRIBES." at -13461,3054 h75
  text "8)" at -13661,2903.95 h75
  text "ALL DRILL HOLE SIZES AND TOLERANCES APPLY AFTER PLATING." at -13461,2903.95 h75
  text "9)" at -13661,2753.95 h75
  text "THE MINIMUM ANNULAR RING SHALL BE 0.005\"." at -13461,2753.95 h75
  text "10)" at -13716,2603.95 h75
  text "BOW AND TWIST SHALL NOT EXCEED 0.010\" PER INCH." at -13461,2603.95 h75
  text "11)" at -13706,2453.95 h75
  text "FOR PCB ROUTING DIMENSIONS: .XXX = +/-.005\"  .XX = +/-.020\"" at -13461,2453.95 h75
  text "MATERIAL" at -13761,2254 h90
  text "12)" at -13716,2053.95 h75
  text "BASE MATERIAL IS FR4 EPOXY FIBERGLASS" at -13454,2048 h75
  text "SEE STACK-UP LEGEND FOR COPPER CLADDING CALL OUTS" at -13454,1908 h75
  text "13)" at -13716,1903.95 h75
  text "PLATING" at -13761,1704 h90
  text "14)" at -13716,1508.95 h75
  text "ALL HOLES AND CONDUCTIVE SURFACES SHALL BE PLATED WITH A MINIMUM OF 0.001\" COPPER." at -13461,1508.95 h75
  text "15)" at -13716,1358.95 h75
  text "AFTER SOLDERMASK, ALL EXPOSED HOLES AND CONDUCTIVE SURFACES SHALL BE COATED" at -13461,1358.95 h75
  text "WITH A GOLD IMMERSION PLATING TO PRESERVE SOLDERABILITY." at -13454,1208 h75
  text "COATINGS" at -13761,1009 h90
  text "16)" at -13711,813.95 h75
  text "THE SOLDERMASK SHALL BE BLACK LIQUID PHOTO-IMAGEABLE PER IPC-SM-840, TYPE-B, CLASS 2." at -13461,813.95 h75
  text "17)" at -13716,663.95 h75
  text "THE SOLDERMASK REGISTRATION ALLOWANCE IS 0.003\".  THERE SHALL BE NO SOLDERMASK ON" at -13461,663.95 h75
  text "ANY SOLDER PAD OR LAND." at -13461,513.95 h75
  text "MARKING" at -13761,314 h90
  text "18)" at -13716,118.95 h75
  text "THE LEGEND SHALL BE SCREEN-PRINTED USING PERMANENT YELLOW EPOXY INK." at -13461,118.95 h75
  text "19)" at -13716,-31.05 h75
  text "THE SCREEN PRINTING REGISTRATION ALLOWANCE IS 0.007\".  THERE SHALL BE NO INK ON ANY" at -13461,-31.05 h75
  text "SOLDER PAD OR LAND." at -13461,-181 h75
  text "20)" at -13726,-331.05 h75
  text "THE VENDOR CODE AND UL FLAMMABILITY RATING MAY BE ETCHED IN THE FOIL OR MARKED IN" at -13461,-331.05 h75
  text "PERMANENT EPOXY INK (VENDOR'S OPTION)." at -13461,-481 h75
  text "ELECTRICAL TESTING" at -13761,-681 h90
  text "21)" at -13716,-876.05 h75
  text "ALL BOARDS SHALL BE ELECTRICALLY TESTED TO THE SUPPLIED IPC-D-356A NET LIST" at -13461,-876.05 h75
  text "FOR CONTINUITY, OPENS AND SHORTS." at -13461,-1026 h75
  text "Layer Stack Up Detail for: 175-00018_rev1, 4-Chan IR Thermocouple Apps board.PcbDoc" at -13397,-2428.08 h57
  text "Layer" at -13397,-2964.47 h57
  text "COPPER THICKNESS" at -11327,-3055 h100
  text "Name" at -13397,-3078.47 h57
  text "Top Layer (*.GTL)" at -13397,-3406.58 h80
  text "1/2 oz,  1 oz Finished" at -11550,-3419 h100
  text "GND (*.GP1)" at -13397,-3966.42 h80
  text "1 oz" at -11541,-3972 h100
  text "+/- 12V (*.GP2)" at -13397,-4526.25 h80
  text "1 oz" at -11508,-4534 h100
  text "Bottom Layer (*.GBL)" at -13397,-5086.08 h80
  text "1/2 oz,  1 oz Finished" at -11616,-5095 h100
  text "Las Cumbres Observatory, Inc." at 4671,-5489 h90
  text "Las Cumbres Observatory" at 2901,-5609 h150
  text "PRIMARY PCB SPECIFICATIONS" at -6262,-5624 h200
  text "6740 Cortona Dr." at 5111,-5643 h90
  text "Global Telescope Network" at 3061,-5769 h125
  text "Goleta, CA 93117" at 5061,-5793 h90
  text "(REFER TO COMPLETE SPEC LISTING AT LEFT FOR FURTHER DETAILS)" at -6609,-5829 h100
  text "www.lcogt.net" at 5201,-5939 h90
  text "DATE" at 2726,-6049.8 h32
  text "DESIGNED" at 3666,-6049.8 h32
  text "DRAWN" at 4746,-6049.8 h32
  text "SCALE" at 5826,-6049.8 h32
  text "NUMBER OF LAYERS" at -6509,-6079 h150
  text "4" at -2959,-6079.02 h150
  text "Rich Lobdill" at 5051,-6149 h55
  text "Rich Lobdill" at 3926,-6154 h55
  text "1 : 1" at 6111,-6168 h90
  text "4/26/2011" at 2756,-6175 h90
  text "FINISHED THICKNESS" at -6509,-6329 h150
  text ".062\"" at -3134,-6329 h150
  text "CHECKED/DATE" at 2726,-6339.8 h32
  text "APPROVED/DATE" at 4746,-6339.8 h32
  text "BASE MATERIAL" at -6509,-6579 h150
  text "FR4" at -3209,-6579 h150
  text "TITLE" at 2726,-6629.8 h32
  text "175-00018, 3-Chan IR Thermocouple" at 2946,-6774 h100
  text "GOLD IMMERSION" at -3703,-6796 h150
  text "PLATING TYPE" at -6509,-6829 h150
  text "THIS DRAWING EMBODIES A PROPRIETARY DESIGN OWNED BY LAS CUMBRES" at -14129,-6853 h60
  text "OBSERVATORY.  IT IS SUBMITTED FOR A SPECIFIC PURPOSE UNDER A CON-" at -14129,-6953 h60
  text "SIZE" at 2726,-6959.8 h32
  text "DOC NO." at 3186,-6959.8 h32
  text "REV" at 5266,-6959.8 h32
  text "SHEET" at 5726,-6959.8 h32
  text "FIDENTIAL RELATIONSHIP, AND EXCEPT FOR PURPOSES EXPRESSLY GRANTED" at -14129,-7048 h60
  text "OF" at 6156,-7063 h60
  text "SOLDER MASK COLOR" at -6509,-7079 h150
  text "BLACK" at -3084,-7079 h150
  text "1" at 5986,-7083 h100
  text "X" at 6386,-7083 h100
  text "1" at 5411,-7096 h130
  text "-" at 3741,-7098 h130
  text "GPT" at 4460.72,-7112.8 h130
  text "C" at 2861,-7114 h100
  text "IN WRITING, ALL RIGHTS ARE RESERVED BY LAS CUMBRES OBSERVATORY." at -14129,-7138 h60
Mechanical 5:
  text "175-00018 rev 1, 3_Chan Thermocouple Apps Module" at -468.97,-703.42 h80
  text "LAS CUMBRES OBSERVATORY     04/26/2011" at -468.97,-853.43 h80
Drill Drawing:
  lines w10: -14239,-7214 -14239,8786 6761,8786 6761,-7214 -14239,-7214 ; 2706,-7108 ccw(c2756,-7108) 2756,-7158 3086,-7158 ccw(c3086,-7118) 3126,-7118 3126,-6948 ccw(c3086,-6948) 3086,-6908 2706,-6908 2706,-7108 ; 2706,-6818 ccw(c2756,-6818) 2756,-6868 6656,-6868 ccw(c6656,-6818) 6706,-6818 6706,-6628 ccw(c6656,-6628) 6656,-6578 2706,-6578 2706,-6818 ; 2706,-6498 ccw(c2746,-6498) 2746,-6538 4166,-6538 ccw(c4166,-6488) 4216,-6488 4216,-6338 ccw(c4166,-6338) 4166,-6288 2706,-6288 2706,-6498 ; 3166,-7118 ccw(c3206,-7118) 3206,-7158 5166,-7158 ccw(c5166,-7118) 5206,-7118 5206,-6948 ccw(c5166,-6948) 5166,-6908 3166,-6908 3166,-7118 ; 4256,-6488 ccw(c4306,-6488) 4306,-6538 5716,-6538 ccw(c5716,-6488) 5766,-6488 5766,-6338 ccw(c5716,-6338) 5716,-6288 4256,-6288 4256,-6488 ; 5246,-7108 ccw(c5296,-7108) 5296,-7158 5626,-7158 ccw(c5626,-7118) 5666,-7118 5666,-6948 ccw(c5626,-6948) 5626,-6908 5246,-6908 5246,-7108 ; 5706,-7118 ccw(c5746,-7118) 5746,-7158 6656,-7158 ccw(c6656,-7108) 6706,-7108 6706,-6958 ccw(c6656,-6958) 6656,-6908 5706,-6908 5706,-7118 ; 5806,-6488 ccw(c5856,-6488) 5856,-6538 6656,-6538 ccw(c6656,-6488) 6706,-6488 6706,-6338 ccw(c6656,-6338) 6656,-6288 5806,-6288 5806,-6488
  lines w20: -14213.94,-6583.12 cw(c-14164,-6658) -14164,-6568 ; -14164,-6608 ccw(c-14164,-6658) -14214,-6658 -14214,-7148 ccw(c-14164,-7148) -14164,-7198 -10964,-7198 ccw(c-10964,-7148) -10914,-7148 -10914,-6808 ccw(c-10964,-6808) -10964,-6758 -13604,-6758 ; -10889.12,-7197.94 ccw(c-10964,-7148) -10874,-7148 -10874,-6808 ; 2660.92,-7196.66 cw(c2756,-7108) 2626,-7108 2626,-6288 cw(c2706,-6288) 2706,-6208 6656,-6208 cw(c6656,-6338) 6744.66,-6242.92 ; 2666,-7108 ccw(c2756,-7108) 2756,-7198 6656,-7198 ccw(c6656,-7108) 6746,-7108 6746,-6338 ccw(c6656,-6338) 6656,-6248 2706,-6248 ccw(c2706,-6288) 2666,-6288 2666,-7108
  lines w30: -14739,-7714 -14739,9286 7261,9286 7261,-7714 -14739,-7714
  text ".Legend" at -3765,-3097 h100
  text "DESIGNED" at 2726,-6339.8 h32
  text "DRAWN" at 4276,-6339.8 h32
  text "SCALE" at 5826,-6339.8 h32
  text "Rich Lobdill" at 3212,-6436 h55
  text "Rich Lobdill" at 4773,-6438 h55
  text "1 : 1" at 6111,-6458 h90
  text "TITLE" at 2726,-6629.8 h32
  text "175-00018, 3-Chan IR Thermocouple" at 2943,-6774 h100
  text "THIS DRAWING EMBODIES A PROPRIETARY DESIGN OWNED BY LAS CUMBRES" at -14124,-6868 h60
  text "SIZE" at 2726,-6959.8 h32
  text "DOC NO." at 3186,-6959.8 h32
  text "REV" at 5266,-6959.8 h32
  text "SHEET" at 5726,-6959.8 h32
  text "OBSERVATORY.  IT IS SUBMITTED FOR A SPECIFIC PURPOSE UNDER A CON-" at -14124,-6968 h60
  text "FIDENTIAL RELATIONSHIP, AND EXCEPT FOR PURPOSES EXPRESSLY GRANTED" at -14124,-7063 h60
  text "OF" at 6156,-7063 h60
  text "2" at 5971,-7083 h100
  text "X" at 6386,-7083 h100
  text "-" at 3741,-7098 h130
  text "1" at 5406,-7098 h130
  text "C" at 2861,-7114 h120
  text "GD1" at 4561,-7114 h120
  text "IN WRITING, ALL RIGHTS ARE RESERVED BY LAS CUMBRES OBSERVATORY." at -14124,-7153 h60

## Dimensions
0,0 to 0,3149.61 on Mechanical 2
0,0 to 1377.95,0 on Mechanical 2

## Text inside footprints (layer, text, board x,y; h text height)
P1: Bottom Overlay "1" at 991,831 h30; Bottom Overlay "103" at 989,2288 h30